# Altium PCB Copy of BRAINS.PcbDoc
Units mm, origin at the board's own origin, x right, y up, seen from the top; angles counter-clockwise.
Board outline 25 x 19 mm, 4 copper layers (Top Layer, Layer 1, Layer 2, Bottom Layer), stack 1.868 mm thick; 50 components, 36 nets, 159 pads, 83 vias.
Unrouted connection lines stored in the file: 19.
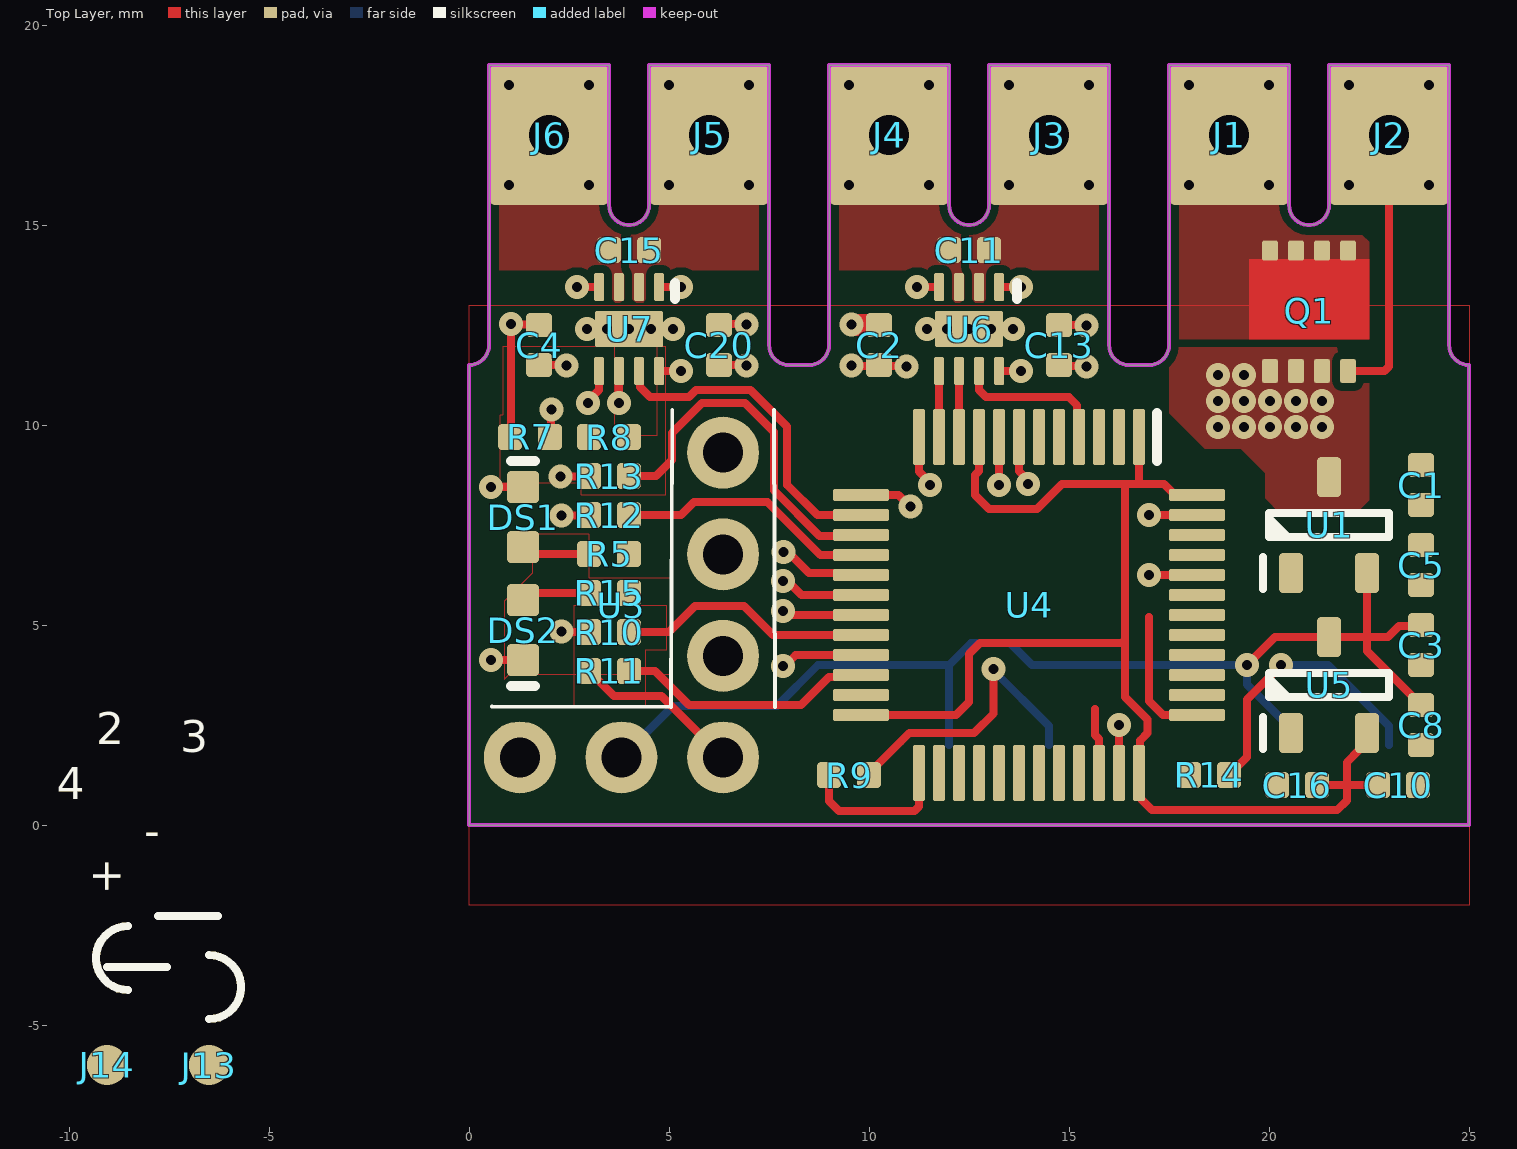
[diagram p0: Top Layer view]
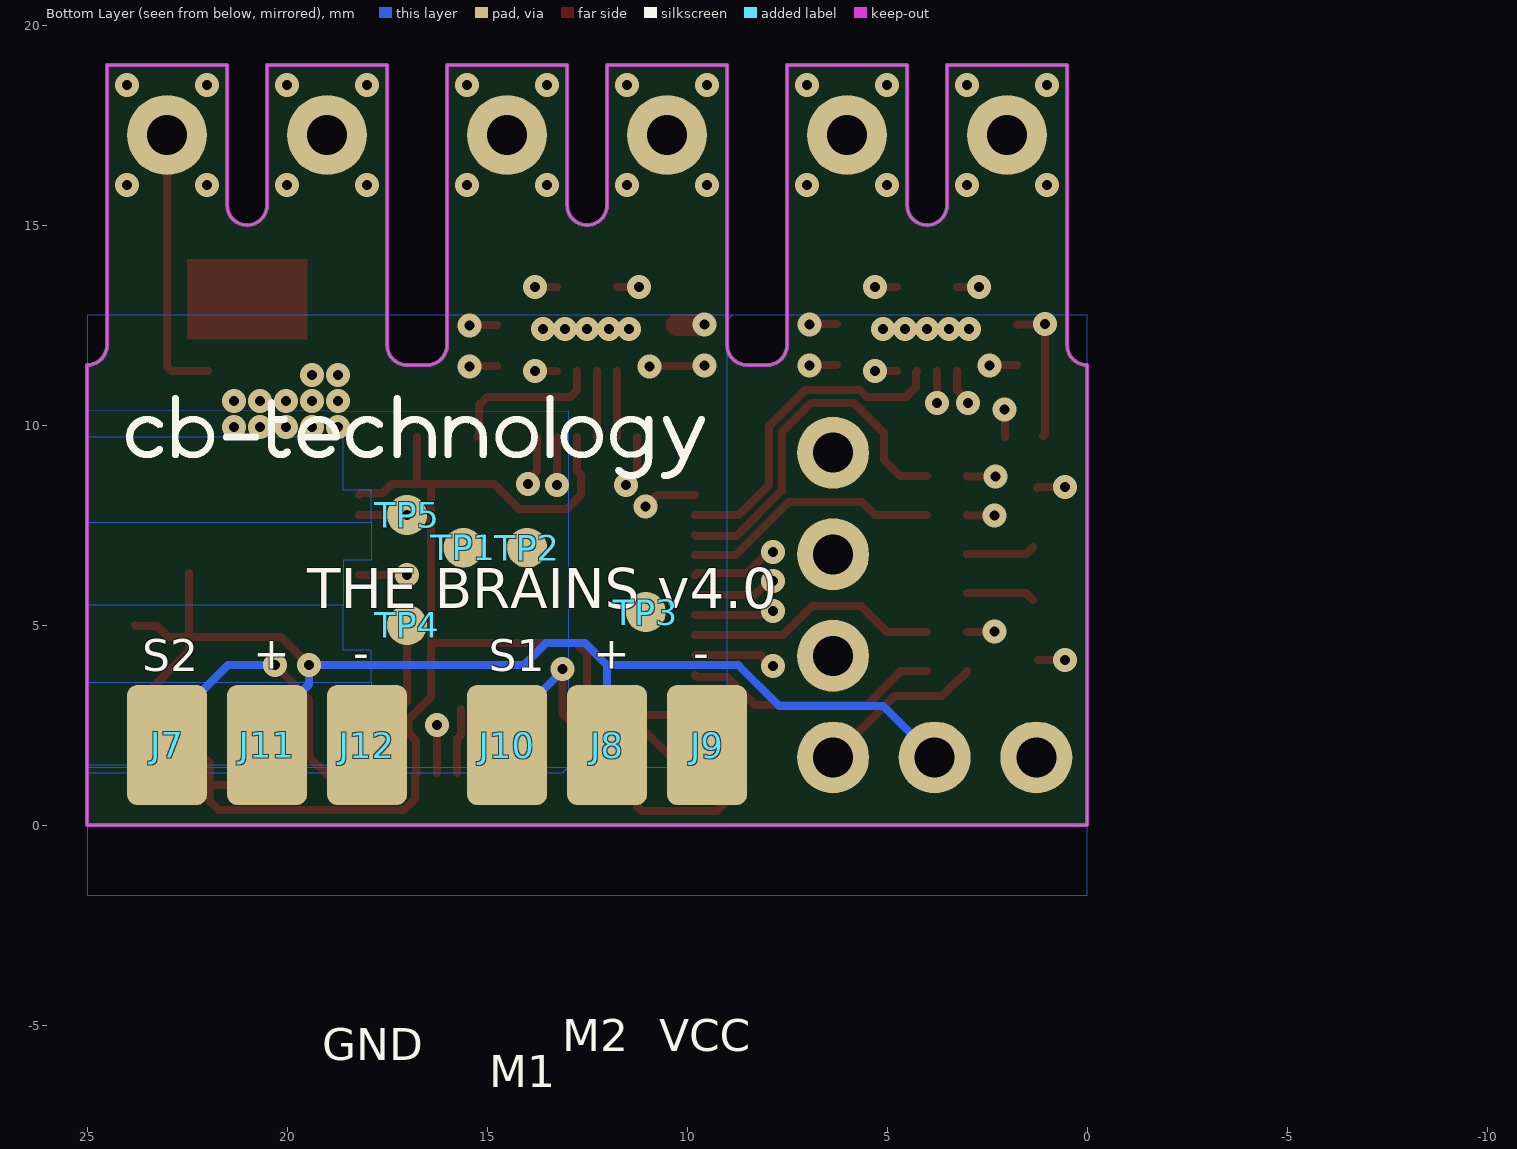
[diagram p1: Bottom Layer view, seen from below]
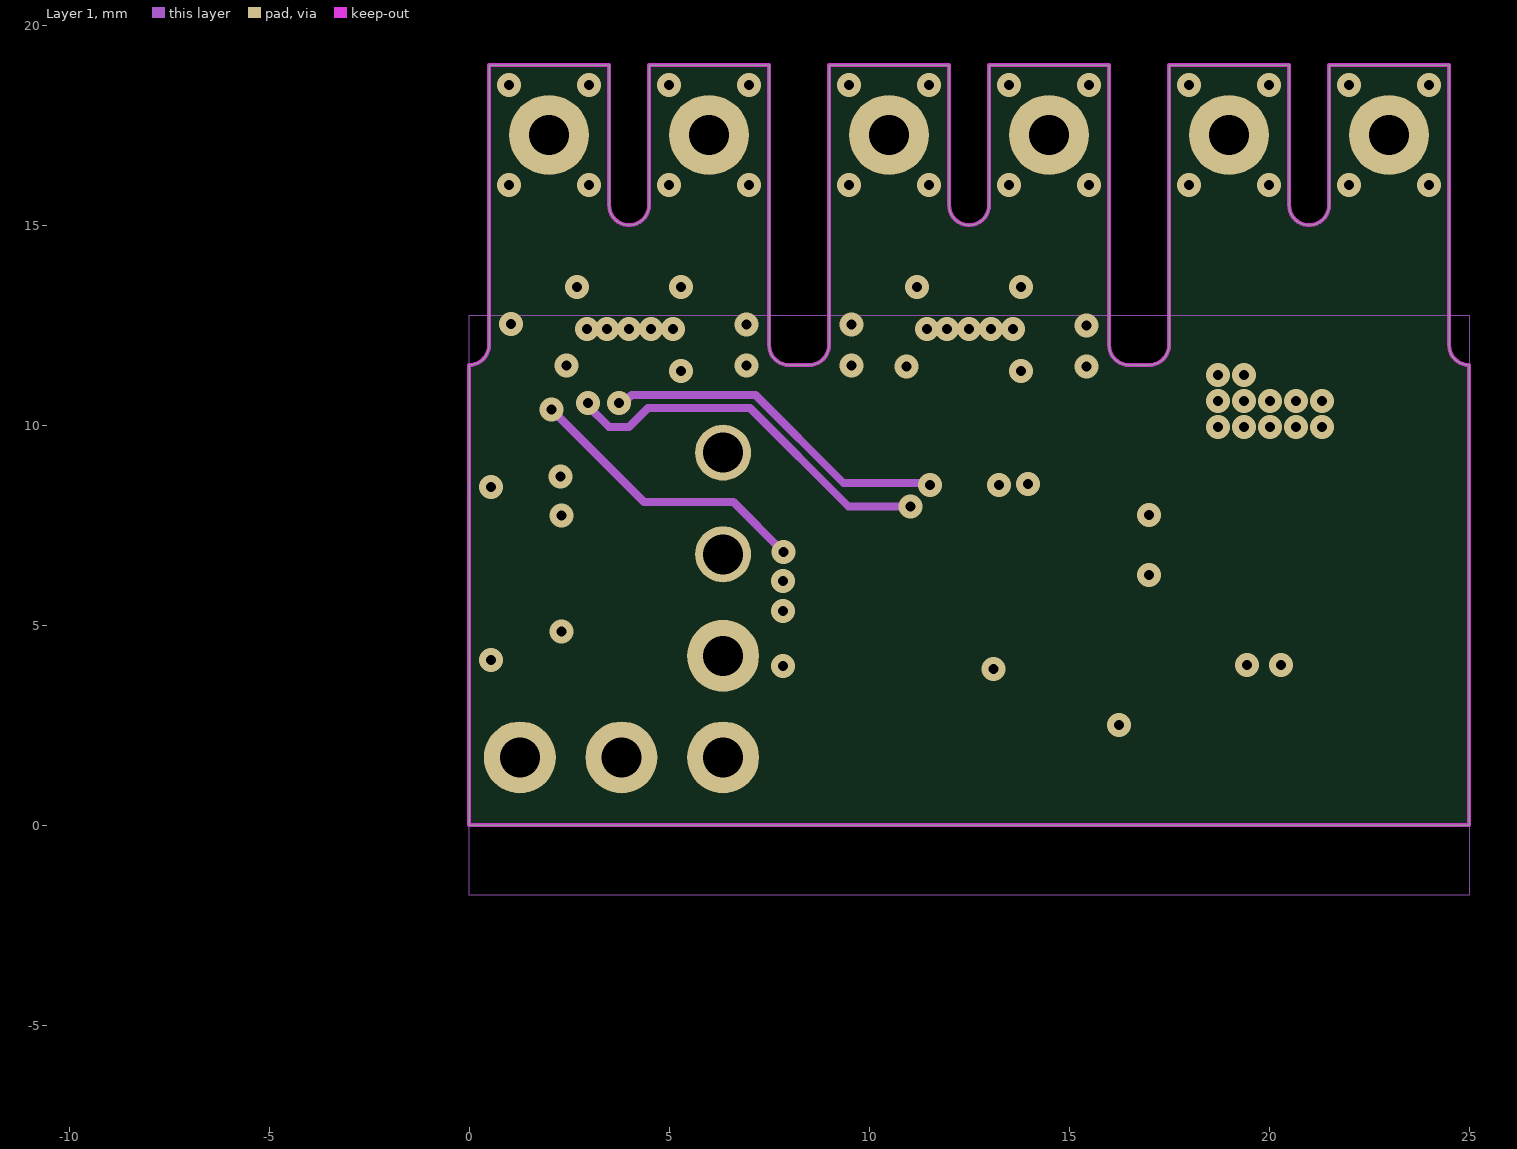
[diagram p2: Layer 1]
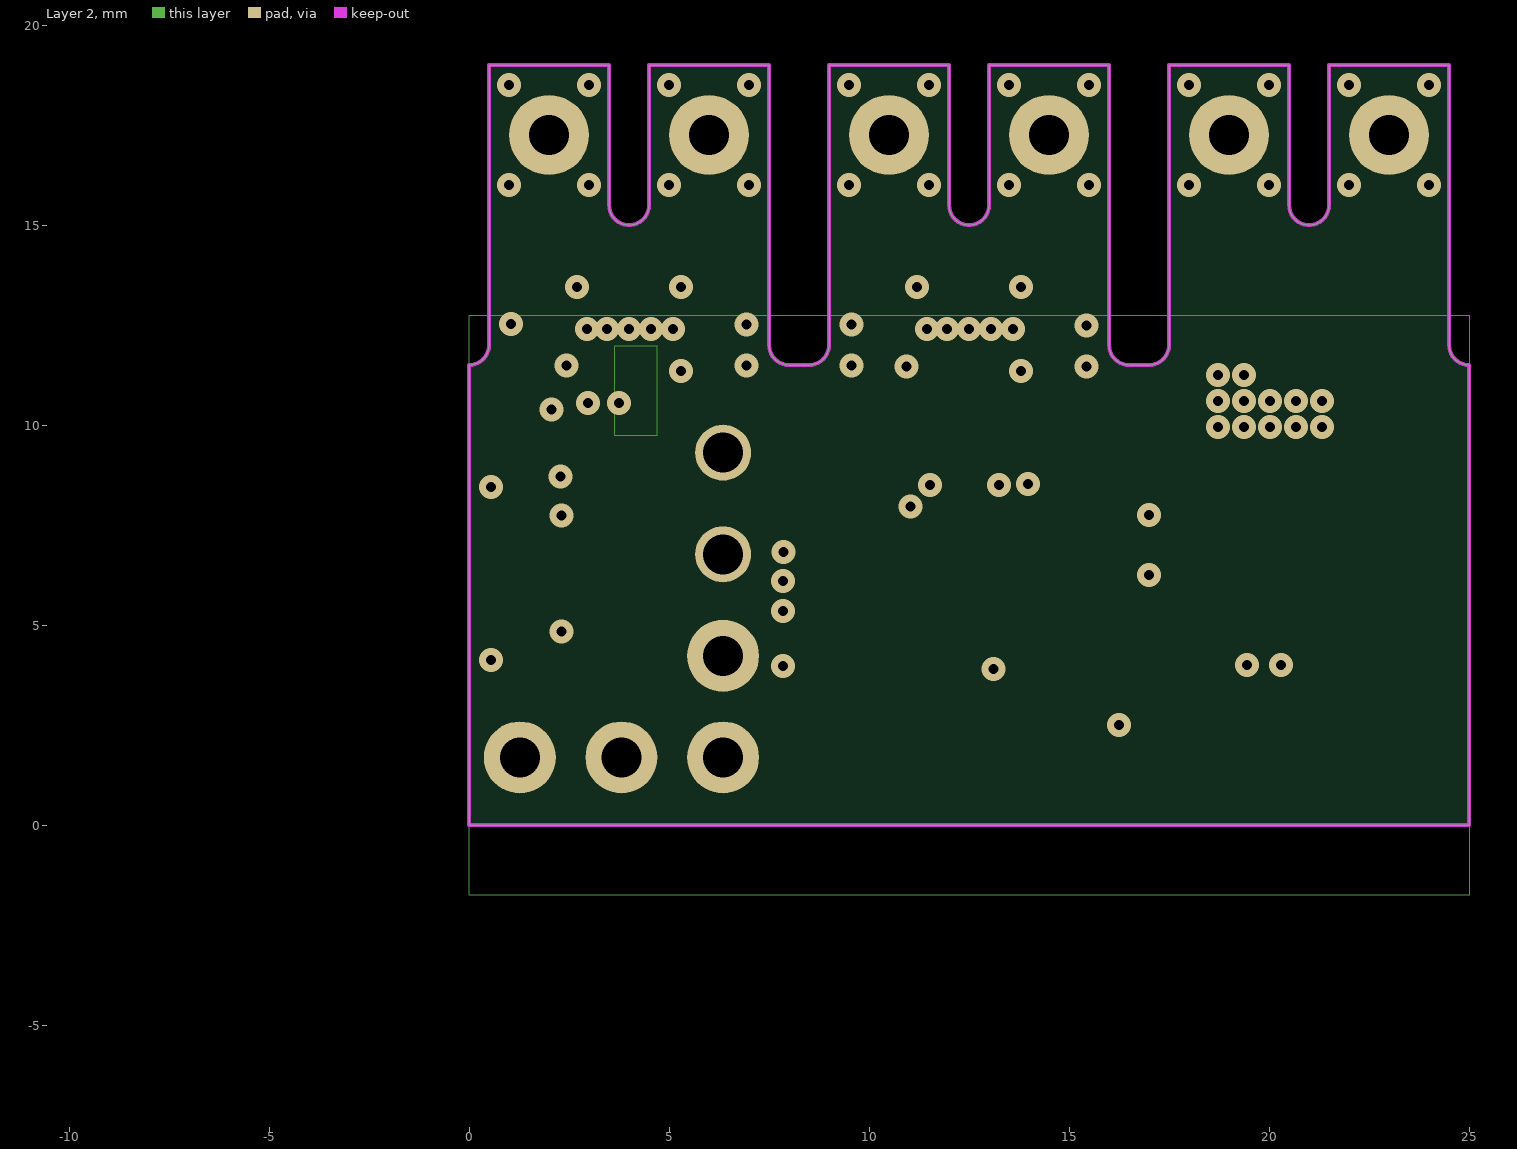
[diagram p3: Layer 2]

## Layer stack, top to bottom
Top Solder: solder mask 0.0102, Solder Resist, Dk 3.5
Top Layer: signal copper 0.0356
Dielectric 1: core 0.1016, FR-4, Dk 4.5
Layer 1: signal copper 0.035
Dielectric1: core 1.524, FR-4, Dk 4.5
Layer 2: signal copper 0.035
Dielectric 2: core 0.1016, FR-4, Dk 4.5
Bottom Layer: signal copper 0.0356
Bottom Solder: solder mask 0.0102, Solder Resist, Dk 3.5

## Board outline
0,11.5 ccw(c0,12) 0.5,12 0.5,19 3.5,19 3.5,15.5 ccw(c4,15.5) 4.5,15.5 4.5,19 7.5,19 7.5,12 ccw(c8,12) 8,11.5 8.5,11.5 ccw(c8.5,12) 9,12 9,19 12,19 12,15.5 ccw(c12.5,15.5) 13,15.5 13,19 16,19 16,12 ccw(c16.5,12) 16.5,11.5 17,11.5 ccw(c17,12) 17.5,12 17.5,19 20.5,19 20.5,15.5 ccw(c21,15.5) 21.5,15.5 21.5,19 24.5,19 24.5,12 ccw(c25,12) 25,11.5 25,0 0,0

## Design rules (kind name [scope] priority, off if disabled: settings)
AcuteAngle [All] p1: minimum=6.00000000000000E+0001 checktracksonly=TRUE
AssemblyTestPointUsage [All] p1: valid=2
AssemblyTestpoint [All] p1: testpointundercomponent=FALSE minsize=1 maxsize=2.5 preferedsize=1.5 minholesize=0 maxholesize=1 preferedholesize=0.8 testpointgrid=0.1 usegrid=TRUE gridoriginx=100 gridoriginy=80 gridtolerance=0 allowsidebottom=TRUE minspacing=3
Clearance [All] p1: gap=0.199 ignorepadtopadclearanceinfootprint=FALSE except(0: Arc-Hole Track-Hole SMDPad-Hole THPad-Hole Via-Hole Fill-Hole Poly-Hole Region-Hole Text-Hole; 0.127: Arc-Arc Arc-Track Track-Track SMDPad-SMDPad Via-Via; 0.15: Arc-Text Track-Text SMDPad-Text THPad-Text Via-Text Fill-Text Poly-Text Region-Text Text-Text)
ComponentClearance [All] p1: gap=0.25 collisioncheckmode=3 verticalgap=0.25 showdistances=TRUE
DiffPairsRouting [All] p1: maxlimit=10 minlimit=0.2 mostfreqgap=0.254 toplayer_prefgap=0.2 toplayer_minwidth=0.381 toplayer_maxwidth=0.381 toplayer_prefwidth=0.381 midlayer1_mingap=0.254 midlayer1_maxgap=0.254 midlayer1_minwidth=0.381 midlayer1_maxwidth=0.381 midlayer1_prefwidth=0.381 midlayer2_mingap=0.254 midlayer2_maxgap=0.254 midlayer2_minwidth=0.381 midlayer2_maxwidth=0.381 midlayer2_prefwidth=0.381 bottomlayer_prefgap=0.2 bottomlayer_minwidth=0.381 bottomlayer_maxwidth=0.381 bottomlayer_prefwidth=0.381 maxuncoupledlength=5
FabricationTestPointUsage TestPointUsage [All] p1: valid=0 allowmultiple=FALSE
FabricationTestpoint Testpoint [All] p1: side=1 testpointundercomponent=TRUE minsize=0.3 maxsize=10 preferedsize=1.5 minholesize=0 maxholesize=10 preferedholesize=0.8 testpointgrid=0.025 allowsidetop=TRUE usegrid=FALSE gridtolerance=0
Height [All] p1: minheight=0 maxheight=100 prefheight=5
HoleSize HoleSize_1 [All] p1: absolutevalues=TRUE maxlimit=6.3 minlimit=0.2 maxpercent=80.000 minpercent=20.000
HoleToHoleClearance [IsVia] p1: gap=0.254 allowstackedmicrovias=TRUE
HoleToHoleClearance HoleToHoleClearance_1 [All] p2: gap=0.5 allowstackedmicrovias=TRUE
MatchedLengths DiffPair_GTMatchedLengths [InDifferentialPair ('GT_RX0') Or InDifferentialPair ('GT_RX1') Or InDifferentialPair ('GT_TX2') Or InDifferentialPair ('GT_TX3') Or InDifferentialPair ('GT_TX1') Or InDifferentialPair ('GT_RX2') Or InDifferentialPair ('GT_TX0') Or InDifferentialPair ('GT_RX3')] p1: tolerance=0.127 checknetsindiffpair=TRUE checkdiffpairvsdiffpair=FALSE checkxsignals=FALSE checkothers=FALSE
MinimumAnnularRing [All] p1: minimumring=0.1
MinimumSolderMaskSliver [All] p1: minsoldermaskwidth=0.15
PlaneClearance [All] p1: clearance=0.3
PlaneConnect PlaneConnect_Via [isVia] p1: planeconnectstyle=Direct reliefexpansion=0.508 reliefentries=4 reliefconductorwidth=0.254 reliefairgap=0.254
PlaneConnect [All] p2: planeconnectstyle=Direct reliefexpansion=0.3 reliefentries=4 reliefconductorwidth=0.3 reliefairgap=0.2
PolygonConnect PolygonConnect_Via [isVia] p1: connectstyle=Direct reliefconductorwidth=0.254 reliefentries=4 polygonreliefangle="90 Angle" airgapwidth=0.254
PolygonConnect [All] p2: connectstyle=Direct reliefconductorwidth=0.3 reliefentries=4 polygonreliefangle="90 Angle" airgapwidth=0.254
RoomDefinition BRAINS [InComponentClass('BRAINS')] p1: confinementstyle=ConfineIn formatcopy=TRUE lockcomponents=FALSE outline -96.19,-188.19 -45.39,-188.19 -45.39,-162.79 -96.19,-162.79
RoutingLayers [All] p1: top layer_v5=TRUE mid layer 1_v5=FALSE mid layer 2_v5=FALSE bottom layer_v5=TRUE
RoutingVias [All] p1: holewidth=0.3 width=0.7 viastyle="Through Hole" minholewidth=0.2 minwidth=0.4 maxholewidth=0.3 maxwidth=0.7
SilkToSilkClearance [All] p1: silktosilkclearance=0.1
SilkToSolderMaskClearance SilkscreenOverComponentPads [IsPad] p1: minsilkscreentomaskgap=0.125 clearancetoexposedcopper=TRUE
SolderMaskExpansion SolderMaskExpansion_Via [isvia] p1: expansion=-10 istentingtop=FALSE
SolderMaskExpansion [All] p2: expansion=0.05 istentingtop=FALSE
Width [All] p1: maxlimit=100 minlimit=0.127 preferedwidth=0.15 minimp=50.000000 maximp=50.000000 favimp=50.000000
15 further rules are at their usual default settings.

## Components (designator, comment, footprint, x,y, rotation, side; value= is the part's Value field where it differs from the comment)
C1 "100nF,50V" CAPC1005X05N_0402 23.8,8.5 r270 top
C2 "1uF,50V" CAPC1005X05N_0402 10.25,12 r90 top
C3 "100nF,50V" CAPC1005X05N_0402 23.8,4.5 r90 top
C4 "1uF,50V" CAPC1005X05N_0402 1.75,12 r90 top
C5 "1uF,50V" CAPC1005X05N_0402 23.8,6.5 r90 top
C8 "1uF,50V" CAPC1005X05N_0402 23.8,2.5 r90 top
C10 "100nF,50V" CAPC1005X05N_0402 23.225,1 r180 top
C11 "100nF,50V" CAPC1005X05N_0402 12.5,14.375 r0 top
C13 "100nF,50V" CAPC1005X05N_0402 14.75,12 r90 top
C15 "100nF,50V" CAPC1005X05N_0402 4,14.375 r0 top
C16 "1uF,50V" CAPC1005X05N_0402 20.7,1 r0 top
C20 "100nF,50V" CAPC1005X05N_0402 6.25,12 r90 top
DS1 "SML-LX0603IW-TR" LED_SML-LX0603 1.35,7.7 r270 top
DS2 "SML-LX0603GW-TR" LED_SML-LX0603 1.35,4.875 r90 top
J1 "MountingPad(2x2)" MountingPad(2x2)#1 19,17.25 r180 top
J2 "MountingPad(2x2)" MountingPad(2x2)#1 23,17.25 r180 top
J3 "MountingPad(2x2)" MountingPad(2x2)#1 14.5,17.25 r0 top
J4 "MountingPad(2x2)" MountingPad(2x2)#1 10.5,17.25 r0 top
J5 "MountingPad(2x2)" MountingPad(2x2)#1 6,17.25 r0 top
J6 "MountingPad(2x2)" MountingPad(2x2)#1 2,17.25 r0 top
J7 "MountingPad(2x2)" MountingPad(2x2)#2 23,2 r180 bottom
J8 "MountingPad(2x2)" MountingPad(2x2)#2 12,2 r180 bottom
J9 "MountingPad(2x2)" MountingPad(2x2)#2 9.5,2 r180 bottom
J10 "MountingPad(2x2)" MountingPad(2x2)#2 14.5,2 r180 bottom
J11 "MountingPad(2x2)" MountingPad(2x2)#2 20.5,2 r180 bottom
J12 "MountingPad(2x2)" MountingPad(2x2)#2 18,2 r180 bottom
J13 "MountingPad(2x2)" MountingPad(2x2)#3 -6.725,-5.45 r0 top
J14 "MountingPad(2x2)" MountingPad(2x2)#4 -9.275,-5.6 r0 top
Q1 "RQ3E120ATTB" ROHM-HSMT8 21,12.75 r90 top
R5 "120R,1%" RESC1005X04N_0402 3.5,6.775 r0 top
R7 "10K,1%" RESC1005X04N_0402 1.525,9.7 r0 top
R8 "1k8,1%" RESC1005X04N_0402 3.5,9.7 r0 top
R9 "10K,1%" RESC1005X04N_0402 9.5,1.25 r0 top
R10 "10K,1%" RESC1005X04N_0402 3.5,4.825 r180 top
R11 "10K,1%" RESC1005X04N_0402 3.5,3.85 r180 top
R12 "10K,1%" RESC1005X04N_0402 3.5,7.75 r0 top
R13 "10K,1%" RESC1005X04N_0402 3.5,8.725 r0 top
R14 "10K,1%" RESC1005X04N_0402 18.5,1.25 r0 top
R15 "120R,1%" RESC1005X04N_0402 3.5,5.8 r0 top
TP1 "TP_SMT" TP_100 15.59,6.931 r180 bottom
TP2 "TP_SMT" TP_100 14,6.931 r90 bottom
TP3 "TP_SMT" TP_100 11.031,5.325 r90 bottom
TP4 "TP_SMT" TP_100 17,5 r90 bottom
TP5 "TP_SMT" TP_100 17,7.75 r90 bottom
U1 "AP2127N" SOT95P237X112-3N_SOT23 21.5,7.5 r90 top
U3 "FS2A" FS2A 0,11 r0 top locked
U4 "STM32L051C6T6" TSQFP50P900X900X160-48N_48LQFP 14,5.5 r270 top locked
U5 "AP2127N" SOT95P237X112-3N_SOT23 21.5,3.5 r90 top
U6 "DRV8837C" DFN50P200X200X80-8N 12.5,12.4 r270 top
U7 "DRV8837C" DFN50P200X200X80-8N 4,12.4 r270 top

## Footprints (in the part's own frame and the unit in brackets; to place one, negate y for a bottom-side part, rotate by r counter-clockwise, add the part's x,y. Pads: shape width x height; smd on the part's side, far side on the other; paste and mask are expansions set on the pad)
CAPC1005X05N_0402 [mm] "Chip Capacitor, 2-Leads, Body 1.0x0.5mm, IPC Medium Density"
  rrect33% 0.6x0.65 smd mask+0.05: 1(-0.5,0) 2(0.5,0)
  body extent -0.5,-0.28 0.5,0.27, height 0.5
DFN50P200X200X80-8N [mm] "DFN, 8-Leads, Body 2.1x2.1mm (max), Pitch 0.50mm, IPC Medium Density"
  rrect33% 0.7x0.25 smd: 1(-1.05,0.75) 2(-1.05,0.25) 3(-1.05,-0.25) 4(-1.05,-0.75) 5(1.05,-0.75) 6(1.05,-0.25) 7(1.05,0.25) 8(1.05,0.75)
  rrect9% 0.9x1.7 smd paste-0.2: 9(0,0)
  silkscreen extent -1.15,1.2 -0.75,1.2, body extent -1.05,-1.05 1.05,1.05, height 0.8
FS2A [mm]
  round 1.8 hole 1: 1(1.27,-9.31) 5(3.81,-9.31) 9(6.35,-9.31) 10(6.35,-6.77)
  round 1.8 / inner round 1.4 / far side round 1.8 hole 1: 11(6.35,-4.23) 12(6.35,-1.69)
LED_SML-LX0603 [mm] "Chip led, 2-Leads, Body 1.6x0.8mm, IPC Medium Density"
  rrect25% 0.8x0.8 smd: 1(-0.75,0) 2(0.75,0)
  silkscreen extent -1.4,-0.3 -1.4,0.3, body extent -0.8,-0.4 0.8,0.4, height 0.63
MountingPad(2x2)#1 [mm]
  rrect10% 3x3.5 smd: 1(0,0)
MountingPad(2x2)#2 [mm]
  rrect25% 2x3 smd: 1(0,0)
MountingPad(2x2)#3 [mm]
  round 1 smd: 1(0.225,-0.55)
MountingPad(2x2)#4 [mm]
  round 1 smd: 1(0.225,-0.4)
RESC1005X04N_0402 [mm] "Chip Resistor, 2-Leads, Body 1.0x0.5mm, IPC Medium Density"
  rrect33% 0.6x0.65 smd mask+0.05: 1(-0.5,0) 2(0.5,0)
  body extent -0.5,-0.25 0.5,0.25, height 0.35
ROHM-HSMT8 [mm] "MOSFET N CH 60V 34.5A 8DFN"
  rrect29% 0.6x0.4 smd mask+0.05: 1(-1.4,0.975) 2(-1.4,0.325) 3(-1.4,-0.325) 4(-1.4,-0.975)
  rrect29% 0.5x0.4 smd mask+0.05: 5(1.61,-0.975) 6(1.61,-0.325) 7(1.61,0.325) 8(1.61,0.975)
  Top Layer region: 1.4,1.19 1.4,0.76 1.4,0.54 1.4,0.11 1.4,-0.11 1.4,-0.54 1.4,-0.76 1.4,-1.19 1.4,-1.5 -0.6,-1.5 -0.6,1.5 1.4,1.5
  body extent -1.5,-1.65 1.5,1.65, height 0.9
SOT95P237X112-3N_SOT23 [mm] "SOT23, 3-Leads, Body 3.0x2.6mm (max), Pitch 0.95mm, IPC Medium Density"
  rrect33% 1x0.6 smd: 1(-1.2,0.95) 2(-1.2,-0.95) 3(1.2,0)
  silkscreen extent -1.6,-1.5 0.3,1.65, body extent -1.32,-1.52 1.32,1.52, height 1.11
TP_100 [mm]
  round 1 smd paste-5 mask-0.05: 1(0,0)
TSQFP50P900X900X160-48N_48LQFP [mm] "TSQFP, 48-Leads, Body 9.1x9.1mm (max), Pitch 0.50mm, IPC Medium Density"
  rrect33% 1.4x0.3 smd mask+0.15: 1(-4.2,2.75) 2(-4.2,2.25) 3(-4.2,1.75) 4(-4.2,1.25) 5(-4.2,0.75) 6(-4.2,0.25) 7(-4.2,-0.25) 8(-4.2,-0.75) 9(-4.2,-1.25) 10(-4.2,-1.75) 11(-4.2,-2.25) 12(-4.2,-2.75) 25(4.2,-2.75) 26(4.2,-2.25) 27(4.2,-1.75) 28(4.2,-1.25) 29(4.2,-0.75) 30(4.2,-0.25) 31(4.2,0.25) 32(4.2,0.75) 33(4.2,1.25) 34(4.2,1.75) 35(4.2,2.25) 36(4.2,2.75)
  rrect33% 0.3x1.4 smd mask+0.15: 13(-2.75,-4.2) 14(-2.25,-4.2) 15(-1.75,-4.2) 16(-1.25,-4.2) 17(-0.75,-4.2) 18(-0.25,-4.2) 19(0.25,-4.2) 20(0.75,-4.2) 21(1.25,-4.2) 22(1.75,-4.2) 23(2.25,-4.2) 24(2.75,-4.2) 37(2.75,4.2) 38(2.25,4.2) 39(1.75,4.2) 40(1.25,4.2) 41(0.75,4.2) 42(0.25,4.2) 43(-0.25,4.2) 44(-0.75,4.2) 45(-1.25,4.2) 46(-1.75,4.2) 47(-2.25,4.2) 48(-2.75,4.2)
  silkscreen extent -4.8,3.2 -3.6,3.2, body extent -3.5,-3.5 3.5,3.5, height 1.6

## Part data
C1 C3 C10 C11 C13 C15 C20: library part CCG-104CE-G, "CAP CER 100nF 50V X7R 0402", Capacitance=100nF, Dielectric=X7R, Manufacturer="Taiyo Yuden", Manufacturer Part Number=UMK105B7104KV-FR, Supplier Part Number 1=587-3498-1-ND, Tolerance=10%, Voltage=50V, BWA PN=CCG-104CE-G, Display_Name=100nF,50V, Schematic Symbol=CAP-NP_1, Supplier 1=Digi-Key, Type=Ceramic
C2 C4 C5 C8 C16: library part CCG-106DH-H, "CAP CER 1UF 50V X5R 0402", Capacitance=1uF, Dielectric=X5R, Manufacturer="Taiyo Yuden", Manufacturer Part Number=UMK105CBJ105MV-F, Supplier Part Number 1=587-6278-1-ND, Tolerance=20%, Voltage=50V, BWA PN=CCG-106DH-H, Display_Name=1uF,50V, Schematic Symbol=CAP-NP_1, Supplier 1=Digi-Key, Type=Ceramic
DS1: library part LED-10056-A, "LED 635NM RED DIFF 0603 SMD", Colour=Red, Manufacturer="Lumex Opto/Components Inc", Supplier Part Number 1=67-1548-1-ND, Axial Intensity=14mcd, BWA PN=LED-10056-A, Display_Name=SML-LX0603IW-TR, If(max)=20mA, Lens Style/Size="Rectangle, 1mmx0.8mm", Lens type="Diffused, White", Manufacturer Part Number=SML-LX0603IW-TR, Schematic Symbol=LED_1, Supplier 1=Digi-Key, Vf@I=2V, Viewing Angle=160deg, Vr(max)=5V, Wavelength=635nm
DS2: library part LED-10011-A, "LED 565NM GRN DIFF 0603 SMD", Colour=Green, Manufacturer="Lumex Opto/Components Inc", Supplier Part Number 1=67-1549-1-ND, Axial Intensity=18mcd, BWA PN=LED-10011-A, Display_Name=SML-LX0603GW-TR, If(max)=25mA, Lens Style/Size="Rectangle, 1mmx0.8mm", Lens type="Diffused, White", Manufacturer Part Number=SML-LX0603GW-TR, Schematic Symbol=LED_1, Supplier 1=Digi-Key, Vf@I=2.2V, Viewing Angle=160deg, Vr(max)=5V, Wavelength=565nm
Q1: library part TRN-10125-A, "MOSFET P-CH 30V 12A 8HSMT", Manufacturer="Rohm Semiconductor", Supplier Part Number 1=RQ3E120ATTBCT-ND, BWA PN=TRN-10125-A, Display_Name=RQ3E120ATTB, Id(max)="12A (Ta)", Manufacturer Part Number=RQ3E120ATTB, rds(on)="8mOhm @ 12A, 10V", Schematic Symbol=MOSFET-P_5, Supplier 1=Digi-Key, Type=P, Vds(max)=30V, Vgs(max)="±20V / ±20V / ±20V", Vth(max)="2.5V @ 1mA"
R5 R15: library part RSG-120R0-D, "RES 120 OHM 1/16W 0402 SMD", Manufacturer=Yageo, Manufacturer Part Number=RC0402FR-07120RL, Power=0.0625W, Resistance=120R, Supplier Part Number 1=311-120LRCT-ND, Tolerance=1%, BWA PN=RSG-120R0-D, Display_Name=120R,1%, Schematic Symbol=RESISTOR_1, Supplier 1=Digi-Key, Type=Chip
R7 R9 R10 R11 R12 R13 R14: library part RSG-10K00-D, "RES 10K OHM 1/16W 1% 0402 SMD", Manufacturer=Yageo, Manufacturer Part Number=RC0402FR-0710KL, Power=0.0625W, Resistance=10K, Supplier Part Number 1=311-10.0KLRCT-ND, Tolerance=1%, BWA PN=RSG-10K00-D, Display_Name=10K,1%, Schematic Symbol=RESISTOR_1, Supplier 1=Digi-Key, Type=Chip
R8: library part RSG-1K800-D, "RES 1k8 0.0625W 1% 0402 SMD", Manufacturer="Vishay Dale", Manufacturer Part Number=CRCW04021K80FKED, Power=0.0625W, Resistance=1k8, Supplier Part Number 1=541-1.80KLCT-ND, Tolerance=1%, BWA PN=RSG-1K800-D, Display_Name=1k8,1%, Schematic Symbol=RESISTOR_1, Supplier 1=Digi-Key, Type=Chip
TP1 TP2 TP3 TP4 TP5: library part NONPART-002, "Test Point - SMT", BWA PN=NONPART-002, Display_Name=TP_SMT, Schematic Symbol=TP_1
U1 U5: library part ICT-10968-A, "IC REG LINEAR 3.3V 300MA SOT23", Manufacturer="Diodes Incorporated", Manufacturer Part Number=AP2127N-3.3TRG1, Supplier Part Number 1=AP2127N-3.3TRG1DICT-ND, Temp Range="-40°C ~ 85°C", BWA PN=ICT-10968-A, Display_Name=AP2127N, Schematic Symbol=AP2127N-3.3TRG1, Supplier 1=Digi-Key
U4: library part ICT-10938-A, "IC MCU 32BIT 32KB FLASH 48LQFP", Manufacturer=STMicroelectronics, Supplier Part Number 1=497-15202-ND, Temp Range="-40°C ~ 85°C (TA)", BWA PN=ICT-10938-A, Display_Name=STM32L051C6T6, Manufacturer Part Number=STM32L051C6T6, Schematic Symbol=STM32L051C6T6_48LQFP, Supplier 1=Digi-Key
U6 U7: library part ICT-10892-A, "IC HALF-BRIDGE DRVR PWM 8WSON", Manufacturer="Texas Instruments", Manufacturer Part Number=DRV8837CDSGR, Supplier Part Number 1=296-47205-1-ND, Temp Range="-40°C ~ 85°C", BWA PN=ICT-10892-A, Display_Name=DRV8837C, Schematic Symbol=DRV8837C, Supplier 1=Digi-Key

## Free pads (board coordinates)
  round 2 hole 1: 2(2,17.25) 2(6,17.25) 2(10.5,17.25) 2(14.5,17.25) 2(19,17.25) 2(23,17.25)

## Via types
v1: diameter 0.6, hole 0.25, Top Layer to Bottom Layer, tented both sides, 83 vias

## Nets (pads, with @x,y where several pads share a name; then routed paths per layer and width w, separated by ;. In a path a pad name is that pad's centre, name@x,y a point inside that pad or via, vN(x,y) a via of type N, cw(c..) or ccw(c..) an arc to the next point about the centre after c; other vN are vias at no path point)
+3V3: C10.2 C16.2 TP1.1 U4.1 U4.9 U4.24 U4.36 U4.48 U5.2 U6.8 U7.8 | length 34.9
  Top Layer w0.2: U7.8 v1(5.3,11.35) ; U4.24 12.177,2.75 12.5,3.074 12.5,4.275 12.775,4.55 16.326,4.55 16.401,4.625 ; U4.9 12.75,8.854 12.651,8.755 12.651,8.252 13.002,7.901 14.201,7.901 14.825,8.525 16.401,8.525 ; U6.8 v1(13.8,11.35) ; U4.1 16.75,8.525 ; U4.48 18.15,8.3 17.6,8.3 17.375,8.525 16.75,8.525 ; C16.2 21.945,1 ; U5.2 22.25,2.1 22.25,1.875 21.945,1.57 21.945,1 ; C10.2 21.945,1 ; 16.401,4.625 16.401,8.525 ; 16.401,4.625 16.401,3.199 16.963,2.638 16.963,2.3 16.779,2.116 16.779,1.329 U4.36 16.8,1.25 16.8,0.65 17.074,0.376 21.704,0.376 21.945,0.617 21.945,1 ; 16.401,8.525 16.75,8.525
+5V0: C3.2 C8.2 J8.1 J11.1 U1.2 U3.5 U5.3 | length 30.2
  Top Layer w0.2: v1@19.45,3.925 v1(19.45,4) 20.15,4.7 U5.3 22.45,4.7 ; U1.2 22.45,4.7 ; C8.2 23.775,3 23.575,3.2 23.575,3.225 22.45,4.35 22.45,4.7 ; C3.2 23.775,4.975 23.25,4.975 22.975,4.7 22.45,4.7
  Top Layer w0.5: U3.5 U3.5@3.829,1.709
  Bottom Layer w0.2: U3.5 5.095,2.975 7.697,2.975 8.719,3.996 12,3.996 ; J8.1 12,3.996 ; J11.1 20.5,2.467 19.45,3.517 v1(19.45,4) 14.075,4 13.525,4.55 12.554,4.55 12,3.996
BAT_DET: R7.2 R8.1 U4.17 | length 10.1
  Top Layer w0.2: R7.2@2.05,9.7 v1@2.05,10.376 ; v1(7.856,6.827) 7.965,6.827 8.093,6.699 8.098,6.699 8.496,6.301 9.083,6.301 9.084,6.3 9.75,6.3 U4.17
  Layer 1 w0.2: v1(2.063,10.389) 4.376,8.075 6.608,8.075 v1(7.856,6.827)
CALIBRATE: J13.1 U4.21 | length 2.1
  Top Layer w0.2: v1(7.85,3.975) 7.892,3.975 8.167,4.25 U4.21
GND: C1.1 C2.1 C3.1 C4.1 C5.1 C8.1 C10.1 C13.1 C16.1 C20.1 DS1.1 DS2.1 J2.1 J9.1 J12.1 J14.1 pad.2@23,17.25 Q1.4 R8.2 TP5.1 U1.1 U3.1 U4.8 U4.23 U4.35 U4.44 U4.47 U5.1 U6.4 U6.9 U7.4 U7.9 | length 17.7
  Top Layer w0.2: v1(0.55,4.125) DS2.1@1.225,4.125 ; v1(0.55,8.45) 1.225,8.45 DS1.1@1.25,8.425 ; C4.1 v1@2.426,11.5 ; v1(2.7,13.45) U7.4 ; C20.1 v1@6.926,11.5 ; v1@9.574,11.475 v1@10.926,11.475 ; v1(11.2,13.45) U6.4 ; v1@13.25,8.463 U4.8 ; C13.1@14.75,11.475 v1@15.426,11.475 ; U4.35 v1@16.25,2.538 ; v1@16.963,6.25 U4.44 ; v1@16.963,7.75 U4.47 ; Q1.4 22.883,11.35 23,11.467 J2.1
  other v1: 16.25,2.5 17,6.25 17,7.75 13.25,8.5 10.938,11.462 15.438,11.462 2.438,11.487 6.939,11.487 9.561,11.488 2.95,12.4 3.45,12.4 4,12.4 4.55,12.4 5.1,12.4 11.45,12.4 11.95,12.4 12.5,12.4 13.05,12.4 13.6,12.4 22,16 24,16 22,18.5 24,18.5
L_MOTOR+: C11.2 J3.1 pad.2@14.5,17.25 U6.2
  other v1: 13.5,16 15.5,16 13.5,18.5 15.5,18.5
L_MOTOR-: C11.1 J4.1 pad.2@10.5,17.25 U6.3
  other v1: 9.5,16 11.5,16 9.5,18.5 11.5,18.5
L_nSLEEP: U4.4 U6.7 | length 3.9
  Top Layer w0.2: U6.7 12.75,10.875 12.926,10.699 14.995,10.699 15.2,10.494 15.2,9.75 U4.4@15.24,9.71
L_PWM1: U4.10 U6.6 | length 1.7
  Top Layer w0.2: U4.10 U6.6
L_PWM2: U4.11 U6.5 | length 1.6
  Top Layer w0.2: U4.11 U6.5
LED_GREEN: R15.2 U4.19 | length 2
  Top Layer w0.2: v1(7.85,5.35) 7.958,5.35 8.058,5.25 U4.19
LED_RED: R5.2 U4.18 | length 2.1
  Top Layer w0.2: v1(7.85,6.1) 7.958,6.1 8.308,5.75 U4.18
NetDS1_2: DS1.2 R5.1 | length 1.7
  Top Layer w0.2: DS1.2 1.525,6.775 R5.1
NetDS2_2: DS2.2 R15.1 | length 1.7
  Top Layer w0.2: DS2.2 1.525,5.8 R15.1
NetJ1_1: J1.1 pad.2@19,17.25 Q1.5 Q1.6 Q1.7 Q1.8
  other v1: 18,16 20,16 18,18.5 20,18.5
NetJ7_1: J7.1 R14.2 | length 7.1
  Top Layer w0.2: R14.2 19,1.275 19.2,1.475 19.225,1.475 19.45,1.7 19.45,3.141 v1@20.296,3.987
  Bottom Layer w0.2: v1(20.3,4) 21.475,4 23,2.475 J7.1
NetJ10_1: J10.1 R9.2 | length 7.4
  Top Layer w0.2: R9.2 10.2,1.45 10.2,1.494 10.801,2.095 11.005,2.299 12.624,2.299 13.116,2.791 v1(13.116,3.904)
  Bottom Layer w0.2: v1(13.116,3.904) 13.116,3.859 14.5,2.475 J10.1
NetR10_2: R10.2 U3.10 | length 0.7
  Top Layer w0.2: v1@2.324,4.825 R10.2
  other v1: 2.312,4.838
NetR11_2: R11.2 U3.9 | length 4.3
  Top Layer w0.2: R11.2 3,3.825 3.2,3.625 3.225,3.625 3.624,3.226 4.814,3.226 U3.9
NetR12_1: R12.1 U3.11 | length 0.7
  Top Layer w0.2: v1(2.312,7.738) 2.318,7.744 2.994,7.744 R12.1
NetR13_1: R13.1 U3.12 | length 0.7
  Top Layer w0.2: v1(2.287,8.712) 2.293,8.719 2.994,8.719 R13.1
NRST: TP2.1 U4.7 | length 1.3
  Top Layer w0.2: U4.7 13.75,8.847 13.976,8.621 v1(13.976,8.529)
R_MOTOR+: C15.2 J5.1 pad.2@6,17.25 U7.2
  other v1: 5,16 7,16 5,18.5 7,18.5
R_MOTOR-: C15.1 J6.1 pad.2@2,17.25 U7.3
  other v1: 1,16 3,16 1,18.5 3,18.5
R_nSLEEP: U4.14 U7.7 | length 8.3
  Top Layer w0.2: U7.7 4.275,11.325 4.275,10.951 4.525,10.701 5.498,10.701 5.672,10.875 7.037,10.875 7.952,9.96 7.952,8.506 8.708,7.75 U4.14
R_PWM1: U4.12 U7.6 | length 10.9
  Top Layer w0.2: U7.6 3.75,10.551 v1(3.752,10.549) ; U4.12 11.25,8.837 11.525,8.562 v1(11.525,8.5)
  Layer 1 w0.2: v1(3.752,10.549) 3.86,10.549 4.063,10.751 7.161,10.751 9.356,8.557 11.468,8.557 v1(11.525,8.5)
R_PWM2: U4.13 U7.5 | length 11.8
  Top Layer w0.2: v1(2.975,10.55) 2.975,10.6 3.25,10.875 U7.5 ; U4.13 10.738,8.25 11.031,7.958 v1(11.04,7.958)
  Layer 1 w0.2: v1(2.975,10.55) 2.975,10.479 3.504,9.95 4,9.95 4.475,10.424 7.026,10.424 9.492,7.958 v1(11.04,7.958)
RADIO_S1: R11.1 U4.22 | length 6.5
  Top Layer w0.2: R11.1 4.652,3.85 5.502,3 8.3,3 9.002,3.702 9.752,3.702 U4.22
RADIO_S2: R10.1 U4.20 | length 6.4
  Top Layer w0.2: R10.1 5,4.825 5.65,5.475 6.875,5.475 7.6,4.75 U4.20
RADIO_S3: R12.2 U4.16 | length 6.5
  Top Layer w0.2: R12.2 5.3,7.75 5.625,8.075 7.456,8.075 8.78,6.75 U4.16
RADIO_S4: R13.2 U4.15 | length 9.2
  Top Layer w0.2: R13.2 4.676,8.725 5.075,9.124 5.075,9.8 5.823,10.548 6.902,10.548 7.625,9.825 7.625,8.368 8.764,7.229 9.779,7.229 U4.15
SERVO_1: R9.1 U4.25 | length 3.9
  Top Layer w0.2: R9.1 9,0.6 9.25,0.35 11.133,0.35 11.25,0.467 U4.25
SERVO_2: R14.1 U4.2
SWCLK: TP4.1 U4.37 | length 3.4
  Top Layer w0.2: 17,5.2 17,3.1 17.35,2.75 U4.37
SWDIO: TP3.1 U4.34 | length 1.6
  Top Layer w0.2: 15.651,2.905 15.651,2.252 15.75,2.153 U4.34
VCC: C1.2 C2.2 C4.2 C5.2 C13.2 C20.2 Q1.1 Q1.2 Q1.3 R7.1 U1.3 U6.1 U7.1 | length 6.7
  Top Layer w0.2: R7.1@1.1,9.725 1.049,9.776 v1(1.049,12.525) 1.061,12.512 1.737,12.512 C4.2 ; U7.1 v1(5.3,13.45) ; C20.2@6.25,12.525 v1@6.926,12.525 ; U6.1 v1(13.8,13.45) ; C13.2 v1@15.426,12.5
  Top Layer w0.55: v1@9.574,12.5 C2.2
  other v1: 18.725,9.95 19.375,9.95 20.025,9.95 20.675,9.95 21.325,9.95 18.725,10.6 19.375,10.6 20.025,10.6 20.675,10.6 21.325,10.6 18.725,11.25 19.375,11.25 15.438,12.487 6.939,12.512 9.561,12.512
pads on no net: U4.3 U4.5 U4.6 U4.26 U4.27 U4.28 U4.29 U4.30 U4.31 U4.32 U4.33 U4.38 U4.39 U4.40 U4.41 U4.42 U4.43 U4.45 U4.46

## Polygon pours and split planes (outlines as drawn)
VCC on Top Layer "NONET_L-01_P-001" (solid, remove dead copper, pour order 34): 22.5,8.125 22.175,7.8 20.27,7.8 19.9,8.17 19.9,8.8 19.294,9.406 18.394,9.406 17.5,10.3 17.5,12.15 22.5,12.15
NetJ1_1 on Top Layer "NONET_L-01_P-001" (solid, remove dead copper, pour order 33): 20.5,19 20.5,15.5 21,15.5 21,14.75 22.331,14.75 22.5,14.581 22.5,12.15 17.5,12.15 17.5,19
L_MOTOR- on Top Layer "NONET_L-01_P-001" (solid, remove dead copper, pour order 32): 8.4,19 8.4,13.875 12,13.875 12,12.975 12.5,12.975 12.5,19
L_MOTOR+ on Top Layer "NONET_L-01_P-001" (solid, remove dead copper, pour order 31): 16.75,19 16.75,13.875 13,13.875 13,12.975 12.5,12.975 12.5,19
R_MOTOR- on Top Layer "NONET_L-01_P-001" (solid, remove dead copper, pour order 30): 0,19 0,13.875 3.5,13.875 3.5,12.975 4,12.975 4,19
R_MOTOR+ on Top Layer "NONET_L-01_P-001" (solid, remove dead copper, pour order 29): 8.3,19 8.3,13.875 4.5,13.875 4.5,12.975 4,12.975 4,19
no net on Top Layer "NONET_L-01_P-001" (solid, remove dead copper, shelved, pour order 13): 0.775,10.262 0.85,10.262 0.85,11.975 4.9,11.975 4.9,8.25 2.8,8.25 2.8,8.55 0.775,8.55
VCC on Top Layer "NONET_L-01_P-001" (solid, remove dead copper, shelved, pour order 6): 4.7,11.975 3.625,11.975 3.625,9.75 4.7,9.75
GND on Top Layer "NONET_L-01_P-001" (solid, remove dead copper, shelved, pour order 15): 1.575,7.275 1.575,6.301 0.875,5.601 0.875,3.65 1,3.775 5.05,3.775 5.05,6.175 3.001,6.175 3.001,7.275
GND on Top Layer "NONET_L-01_P-001" (solid, remove dead copper, shelved, pour order 16): 0,13 25,13 25,-2 0,-2
GND on Top Layer "NONET_L-01_P-001" (solid, remove dead copper, shelved, pour order 14): 4.925,5.5 4.925,4.375 4.4,4.375 4.4,2.95 2.625,2.95 2.625,5.5
VCC on Bottom Layer "NONET_L-01_P-001" (solid, remove dead copper, shelved, pour order 21): 12.975,1.45 13.125,1.3 25.03,1.3 25.03,10.372 12.975,10.343
GND on Bottom Layer "NONET_L-01_P-001" (solid, remove dead copper, shelved, pour order 27): 0,12.75 25,12.75 25,-1.75 0,-1.75
NetJ1_1 on Bottom Layer "NONET_L-01_P-001" (solid, remove dead copper, shelved, pour order 22): 25,12.75 25,1.45 9,1.45 9,12.626 8.876,12.75
L_MOTOR- on Bottom Layer "NONET_L-01_P-001" (solid, remove dead copper, shelved, pour order 20): 25,3.575 17.895,3.575 17.895,2.63 17.9,2.625 18.6,2.625 18.6,1.5 25,1.5
L_MOTOR+ on Bottom Layer "NONET_L-01_P-001" (solid, remove dead copper, shelved, pour order 19): 25,3.575 17.895,3.575 17.895,4.37 17.9,4.375 18.6,4.375 18.6,5.5 25,5.5
R_MOTOR- on Bottom Layer "NONET_L-01_P-001" (solid, remove dead copper, shelved, pour order 18): 25,7.575 17.895,7.575 17.895,6.63 17.9,6.625 18.6,6.625 18.6,5.5 25,5.5
R_MOTOR+ on Bottom Layer "NONET_L-01_P-001" (solid, remove dead copper, shelved, pour order 17): 25,7.575 17.895,7.575 17.895,8.37 17.9,8.375 18.6,8.375 18.6,9.7 25,9.7
GND on Layer 1 "NONET_L-01_P-001" (solid, remove dead copper, shelved, pour order 25): 0,12.75 25,12.75 25,-1.75 0,-1.75
VCC on Layer 2 "NONET_L-01_P-001" (solid, remove dead copper, shelved, pour order 26): 4.7,11.975 3.625,11.975 3.625,9.75 4.7,9.75
GND on Layer 2 "NONET_L-01_P-001" (solid, remove dead copper, shelved, pour order 28): 0,12.75 25,12.75 25,-1.75 0,-1.75

## Keep-outs
Keep-Out Layer:
  the board outline again, w0.1

## Silkscreen, mask and mechanical layers (free items; w line width, h text height)
Top Overlay:
  lines w0.1: 0.575,2.96 5.051,2.95 5.08,10.372 ; 7.62,10.372 7.649,2.95
  lines w0.2: -9.05,-3.55 -7.55,-3.55 ; -8.525,-4.125 cw(c-8.525,-3.325) -8.525,-2.525 ; -7.775,-2.275 -6.275,-2.275 ; -6.5,-4.85 ccw(c-6.5,-4.05) -6.5,-3.25
  text "2" at -9.317,2.025 h0.8
  text "3" at -7.217,1.825 h0.8
  text "1" at -12.695,1.78 h0.8
  text "4" at -10.311,0.65 h0.8
  text "-" at -8.118,-0.548 h0.8
  text "+" at -8.707,-1.743 h0.8 r90
  text "DUAL MOTOR ESC" at 7.929,-9.303 h1
Bottom Overlay:
  drawing of 13 lines, arcs and shapes, not listed
  text "+ -" at 42.525,10.583 h1 r90
  text "+ -" at 42.525,6.253 h1 r90
  text "THE BRAINS v4.0" at 19.496,5.424 h1
  text "-" at 9.843,3.907 h0.8
  text "+" at 12.343,3.907 h0.8
  text "-" at 18.343,3.907 h0.8
  text "+" at 20.843,3.907 h0.8
  text "S1" at 14.951,3.85 h0.8
  text "S2" at 23.623,3.85 h0.8
  text "VCC" at 10.69,-5.65 h0.8
  text "M2" at 13.125,-5.65 h0.8
  text "GND" at 19.12,-5.875 h0.8
  text "M1" at 14.95,-6.55 h0.8
Misc:
  lines w0.1: 0,0.42 7.65,0.42 ; 0,2.94 5.1,2.94 5.1,11 7.6,11 7.6,0.42
Sheet Format, Top:
  drawing of 836 lines, arcs and shapes, not listed
  text "1" at -61.607,100.745 h1.85
  text "2" at -12.023,100.745 h1.85
  text "3" at 37.977,100.745 h1.85
  text "4" at 87.977,100.745 h1.85
  text "5" at 137.977,100.745 h1.85
  text "6" at 187.977,100.745 h1.85
  text "7" at 237.977,100.745 h1.85
  text "8" at 287.977,100.745 h1.85
  text "A" at -89.523,84.745 h1.85
  text "A" at 315.477,84.745 h1.85
  text "B" at -89.523,34.745 h1.85
  text "B" at 315.477,34.745 h1.85
  text "C" at -89.523,-15.255 h1.85
  text "C" at 315.477,-15.255 h1.85
  text "D" at -89.523,-65.255 h1.85
  text "D" at 315.477,-65.255 h1.85
  text "E" at -89.523,-115.255 h1.85
  text "E" at 315.477,-115.255 h1.85
  text ".VariantName" at 256.66,-145.804 h2.54
  text "Project" at 195.7,-146.002 h2.54
  text "Variant" at 249.04,-146.002 h2.54
  text ".Project_Description" at 204.59,-146.876 h3.5
  text ".Project_Revision" at 256.66,-152.154 h2.54
  text "Sheet" at 195.7,-152.352 h2.54
  text "Revision" at 249.04,-152.352 h2.54
  text ".Printout_Name" at 204.59,-153.226 h3.5
  text "Design" at 195.7,-157.432 h2.54
  text ".Project_DesignBy" at 207.13,-157.432 h2.54
  text "Checking" at 233.8,-157.432 h2.54
  text ".Project_CheckingBy" at 245.23,-157.432 h2.54
  text "Drafting" at 195.7,-159.972 h2.54
  text ".Project_DraftingBy" at 207.13,-159.972 h2.54
  text "Components" at 233.8,-159.972 h2.54
  text ".Project_ComponentsBy" at 245.23,-159.972 h2.54
  text "Layout" at 195.7,-162.512 h2.54
  text ".Project_LayoutBy" at 207.13,-162.512 h2.54
  text ".Project_Address1" at 273.17,-162.512 h2.54
  text ".Project_Phone" at 295.869,-162.54 h2.54
  text ".Project_Address2" at 273.17,-165.052 h2.54
  text ".Project_Fax" at 295.869,-165.115 h2.54
  text "F" at -89.523,-165.255 h1.85
  text "F" at 315.477,-165.255 h1.85
  text "A3" at 245.23,-166.124 h2.54
  text "Routing" at 195.7,-166.322 h2.54
  text "MECHANICAL LAYER 2" at 207.13,-166.322 h2.54
  text "Size" at 233.8,-166.322 h2.54
  text ".Project_Address3" at 273.17,-167.592 h2.54
  text ".Project_Address4" at 273.17,-170.132 h2.54
  text "Date" at 195.7,-171.402 h2.54
  text ".Print_Date" at 207.13,-171.402 h2.54
  text "Time" at 233.8,-171.402 h2.54
  text ".Print_Time" at 245.23,-171.402 h2.54
  text ".Project_Address5" at 273.17,-172.672 h2.54
  text ".Project_URL" at 273.17,-175.212 h2.54
  text "File" at 195.7,-176.482 h2.54
  text ".Pcb_File_Name" at 207.13,-176.482 h2.54
  text "1" at -61.607,-181.255 h1.85
  text "2" at -12.023,-181.255 h1.85
  text "3" at 37.977,-181.255 h1.85
  text "4" at 87.977,-181.255 h1.85
  text "5" at 137.977,-181.255 h1.85
  text "6" at 187.977,-181.255 h1.85
  text "7" at 237.977,-181.255 h1.85
  text "8" at 287.977,-181.255 h1.85